# Altium PCB ADAS_ECU_MB_revA.PcbDoc (part 3 of 5)
Units mm, origin at the board's own origin, x right, y up, seen from the top; angles counter-clockwise.
Board outline 180 x 120 mm, 6 copper layers (Top Layer, Mid Layer 1, Mid Layer 2, Mid Layer 3, Mid Layer 4, Bottom Layer), stack 1.554 mm thick; 449 components, 370 nets, 3941 pads, 78 vias.
Unrouted connection lines stored in the file: 869.
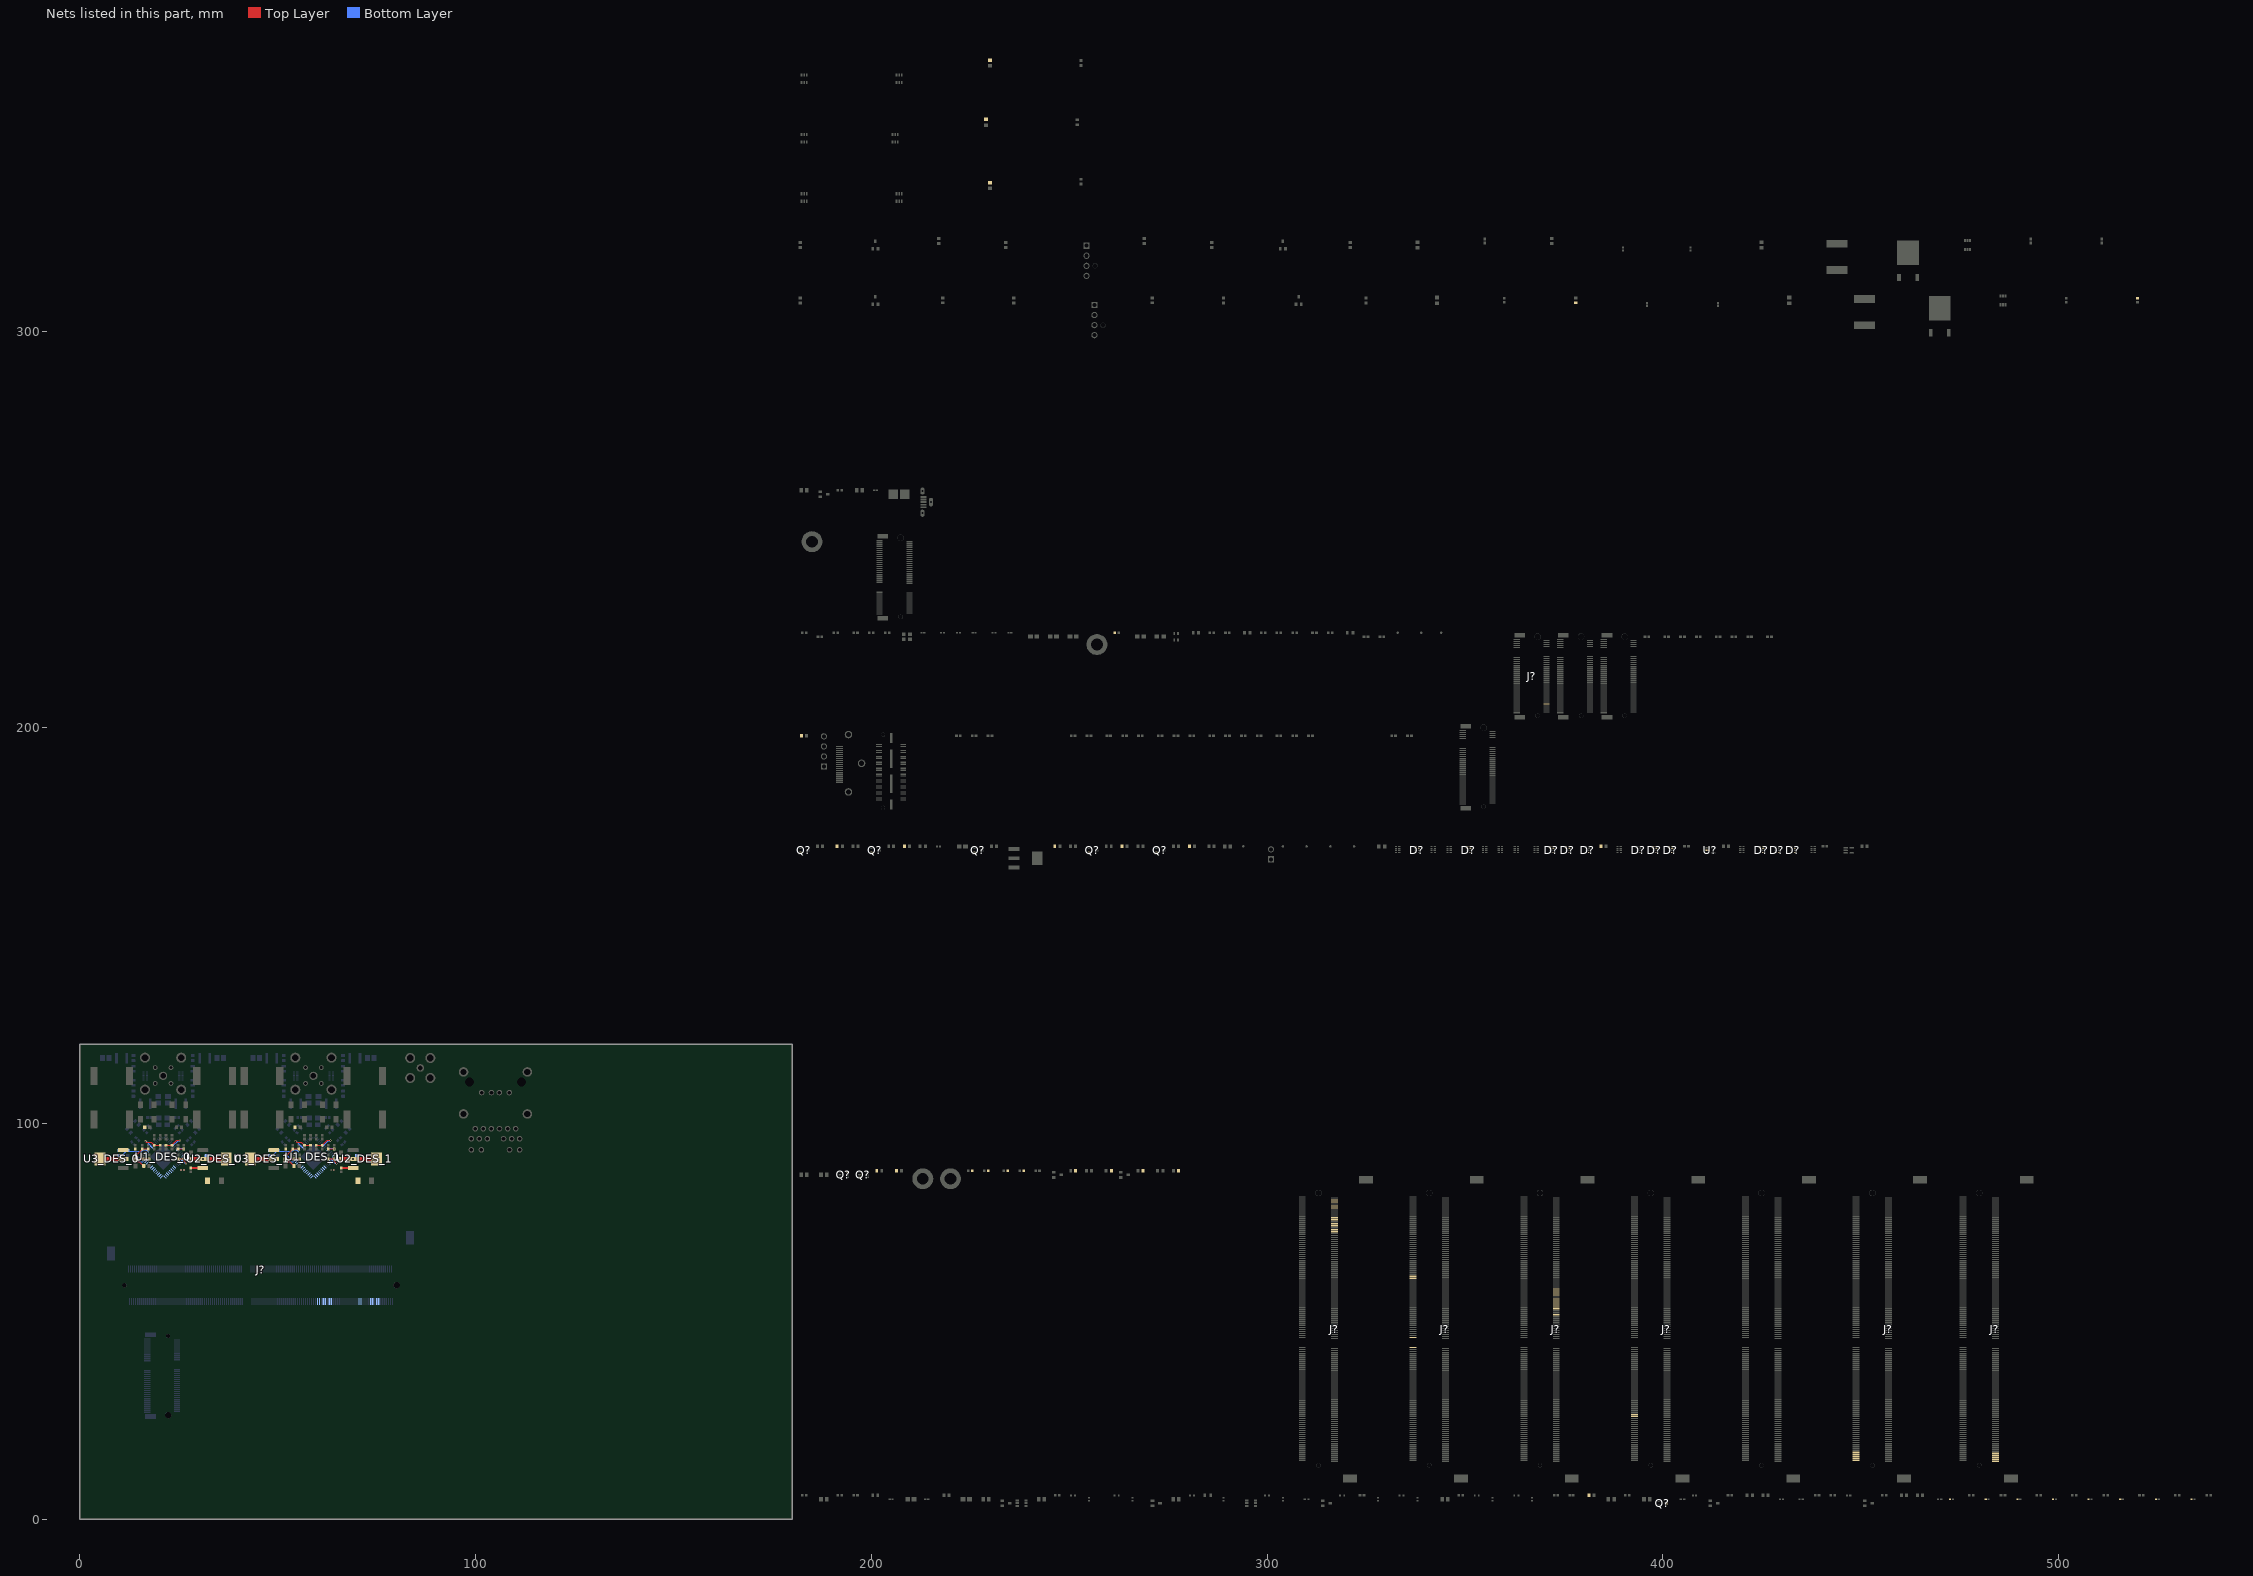
[diagram p2: the nets of this part, all layers, seen from the top]

## Part data (continued)
U? U? U?_FAN_IF_0 U?_FAN_IF_1: library part CMP-019-00043-2, "Power Supply Support Circuit, Adjustable, 1 Channel, PDSO6", Case/Package=TSSOP, Max Supply Voltage=20V, Min Supply Voltage=1.8V, Pins=6, RoHS Compliant=Yes
U?_FAN_IF_0 U?_FAN_IF_1: library part CMP-0244-00204-1, "Positive Voltage Regulator, 12V, 3-Pin DPAK, Tape and Reel", ComponentLink1Description="Manufacturer URL", ComponentLink1URL=http://www.st.com, ComponentLink2Description=Datasheet, ComponentLink2URL=http://www.st.com/internet/com/TECHNICAL_RESOURCES/TECHNICAL_LITERATURE/DATASHEET/CD00000447.pdf, DatasheetVersion=1/11/2010, PackageDescription="3-Pin Transistor Outline Package 2.28 mm Pitch, 9.7 mm Lead Span (DPAK)", PackageReference=TO-252, PackageVersion=2011
Y1_DES_0 Y1_DES_1: library part CMP-2000-05733-3, "Crystal 25MHz ±20ppm (Tol) ±30ppm (Stability) 18pF FUND 60Ω 4-Pin SMD T/R", Case/Package=CSMD, ESR (Equivalent Series Resistance)=60R, Frequency=25MHz, Frequency Stability=30ppm, Frequency Tolerance=20ppm, Load Capacitance=18pF, Max Operating Temperature=85°C, Min Operating Temperature=-40°C, Operating Frequency="25 MHz", Package Quantity=1000, Depth=2.5mm, Height=0.039inch, Lead Free="Lead Free", Length=3.2mm, Mount="Surface Mount", Number of Pins=4, Packaging="Tape and Reel", Radiation Hardening=No, Series=ABM8G, Series Resistance=60R, Termination=SMD/SMT, Tolerance=20ppm, Width=0.098inch
Y?: library part CMP-27762-001115-1, "XTAL OSC XO 32.7680KHZ CMOS SMD", Case/Package=CSMD, Frequency=32.768kHz, Frequency Stability=25ppm, Load Capacitance=15pF, Max Operating Temperature=85°C, Max Supply Current=3.5mA, Min Operating Temperature=-40°C, Min Supply Voltage=2.97V, Operating Supply Voltage=3.3V, Depth=2mm, Height=0.037inch, Lead Free="Lead Free", Length=2.5mm, Mount="Surface Mount", Number of Pins=4, Packaging="Tape and Reel", Radiation Hardening=No, Series=ASDK, Termination=SMD/SMT, Width=0.079inch

## Via types
v1: diameter 0.5, hole 0.2, Top Layer to Bottom Layer, 32 vias
v2: diameter 0.5, hole 0.3, Top Layer to Bottom Layer, 30 vias
v3: diameter 0.7, hole 0.5, Top Layer to Bottom Layer, 16 vias

## Nets (pads, with @x,y where several pads share a name; then routed paths per layer and width w, separated by ;. In a path a pad name is that pad's centre, name@x,y a point inside that pad or via, vN(x,y) a via of type N, cw(c..) or ccw(c..) an arc to the next point about the centre after c; other vN are vias at no path point)
1V8_CAM0_PWDN: J?.114@373.1,53.125 R?.1@201.375,88
1V8_CAM1_PWDN: J?.120@373.1,51.625 R?.1@206.375,88
1V8_SMB_nALERT: R?.1@384.35,170 U?.2@411.23,169
1V8_SPI1_MISO: D?.4@350.583,168.5 D?.7@351.418,168.5 J?.108@373.1,54.625 Q?.2@226.05,168.35 R?.1@246.35,170
1V8_SPI1_MOSI: D?.1@350.583,170 D?.10@351.418,170 J?.104@373.1,55.625 Q?.2@272.05,168.35 R?.1@280.35,170
1V8_SPI1_nCS_0: D?.5@350.583,168 D?.6@351.418,168 J?.110@373.1,54.125 Q?.2@200.05,168.35 R?.1@208.35,170
1V8_SPI1_nCS_1: J?.112@373.1,53.625 Q?.2@182.05,168.35 R?.1@191.35,170
1V8_SPI1_SCLK: D?.2@350.583,169.5 D?.9@351.418,169.5 J?.106@373.1,55.125 Q?.2@255.05,168.35 R?.1@263.35,170
5V_MAIN: J?.251@448.9,16.875 J?.252@484.101,16.625 J?.253@448.9,16.375 J?.254@484.101,16.125 J?.255@448.9,15.875 J?.256@484.101,15.625 J?.257@448.9,15.375 J?.258@484.101,15.125 J?.259@448.9,14.875 J?.260@484.101,14.625 R?.1@182.375,198 R?.2@260.65,88 R?.2@277.65,88 R?_RAIL_DISCH_0.2@230,337.725 R?_RAIL_DISCH_1.2@229,353.725 R?_RAIL_DISCH_2.2@230,368.725
ACT_LED: J?.10@370.65,206 R?.1@261.5,224
CAM0_PWDN: Q?.6@193.95,87.65
CAM1_PWDN: Q?.3@197.05,86.35
CAM_I2C_SCL: D?.4@380.583,168.5 D?.7@381.418,168.5 J?.213@392.9,26.375
CAM_I2C_SDA: D?.5@380.583,168 D?.6@381.418,168 J?.215@392.9,25.875
CAN_RX: D?.1@337.583,170 D?.10@338.418,170 J?.143@336.9,45.875
CAN_TX: D?.2@337.583,169.5 D?.9@338.418,169.5 J?.145@336.9,43.375
CFG0_DES_0: R6_DES_0.1 R8_DES_0.2 U1_DES_0.4 | length 8
  Bottom Layer w0.2: R6_DES_0.1@10,91.85 10.033,91.883 10.658,91.883 11.925,93.15 R8_DES_0.2@12,93.15 12.25,92.9 15.65,92.9 16.05,93.3 16.712,93.3 17.009,93.003 U1_DES_0.4@17.023,93.003
CFG0_DES_1: R6_DES_1.1 R8_DES_1.2 U1_DES_1.4 | length 8
  Bottom Layer w0.2: R6_DES_1.1@48,91.85 48.033,91.883 48.658,91.883 49.925,93.15 R8_DES_1.2@50,93.15 50.25,92.9 53.65,92.9 54.05,93.3 54.712,93.3 55.009,93.003 U1_DES_1.4@55.023,93.003
CKA_DES_0_N: U1_DES_0.40
CKA_DES_0_P: U1_DES_0.39
CKA_DES_1_N: U1_DES_1.40
CKA_DES_1_P: U1_DES_1.39
CKB_DES_0_N: U1_DES_0.46
CKB_DES_0_P: U1_DES_0.45
CKB_DES_1_N: U1_DES_1.46
CKB_DES_1_P: U1_DES_1.45
CONF_SCL_DES_0: U1_DES_0.29
  other v2: 26.25,88.25
CONF_SCL_DES_1: U1_DES_1.29
  other v2: 64.25,88.25
CONF_SDA_DES_0: U1_DES_0.28
  other v2: 25.5,88.25
CONF_SDA_DES_1: U1_DES_1.28
  other v2: 63.5,88.25
CSI0_CLK_N: D?.2@424.583,169.5 D?.9@425.418,169.5 J?.10@317.1,79.125
CSI0_CLK_P: D?.1@424.583,170 D?.10@425.418,170 J?.12@317.1,78.625
CSI0_D0_N: D?.5@424.583,168 D?.6@425.418,168 J?.4@317.1,80.625
CSI0_D0_P: D?.4@424.583,168.5 D?.7@425.418,168.5 J?.6@317.1,80.125
CSI0_D1_N: R?.2@238.5,88
CSI0_D1_P: R?.2@234.5,88
CSI1_D0_N: R?.2@229.5,88
CSI1_D0_P: R?.2@225.5,88
CSI1_D1_N: D?.4@428.583,168.5 D?.7@429.418,168.5 J?.15@75.5,55
CSI1_D1_P: D?.5@428.583,168 D?.6@429.418,168 J?.17@75,55
CSI2_CLK_N: D?.1@371.583,170 D?.10@372.418,170 J?.28@317.1,74.625
CSI2_CLK_P: D?.2@371.583,169.5 D?.9@372.418,169.5 J?.30@317.1,74.125
CSI2_D0_N: D?.4@393.583,168.5 D?.7@394.418,168.5 J?.22@317.1,76.125
CSI2_D0_P: D?.5@393.583,168 D?.6@394.418,168 J?.24@317.1,75.625
CSI2_D1_N: D?.4@371.583,168.5 D?.7@372.418,168.5 J?.34@317.1,73.125
CSI2_D1_P: D?.5@371.583,168 D?.6@372.418,168 J?.36@317.1,72.625
CSI3_D0_N: D?.1@397.583,170 D?.10@398.418,170 J?.21@74,55
CSI3_D0_P: D?.2@397.583,169.5 D?.9@398.418,169.5 J?.23@73.5,55
CSI3_D1_N: D?.4@397.583,168.5 D?.7@398.418,168.5 J?.33@71,55
CSI3_D1_P: D?.5@397.583,168 D?.6@398.418,168 J?.35@70.5,55
DA0_DES_0_N: U1_DES_0.32
DA0_DES_0_P: U1_DES_0.31
DA0_DES_1_N: U1_DES_1.32
DA0_DES_1_P: U1_DES_1.31
DA1_DES_0_N: U1_DES_0.36
DA1_DES_0_P: U1_DES_0.35
DA1_DES_1_N: U1_DES_1.36
DA1_DES_1_P: U1_DES_1.35
DA2_DES_0_N: U1_DES_0.38
DA2_DES_0_P: U1_DES_0.37
DA2_DES_1_N: U1_DES_1.38
DA2_DES_1_P: U1_DES_1.37
DA3_DES_0_N: U1_DES_0.42
DA3_DES_0_P: U1_DES_0.41
DA3_DES_1_N: U1_DES_1.42
DA3_DES_1_P: U1_DES_1.41
DB0_DES_0_N: U1_DES_0.44
DB0_DES_0_P: U1_DES_0.43
DB0_DES_1_N: U1_DES_1.44
DB0_DES_1_P: U1_DES_1.43
DB1_DES_0_N: U1_DES_0.48
DB1_DES_0_P: U1_DES_0.47
DB1_DES_1_N: U1_DES_1.48
DB1_DES_1_P: U1_DES_1.47
DB2_DES_0_N: U1_DES_0.50
DB2_DES_0_P: U1_DES_0.49
DB2_DES_1_N: U1_DES_1.50
DB2_DES_1_P: U1_DES_1.49
DB3_DES_0_N: U1_DES_0.54
DB3_DES_0_P: U1_DES_0.53
DB3_DES_1_N: U1_DES_1.54
DB3_DES_1_P: U1_DES_1.53
DEBUG_RXD: R?.2@268.625,88
DEBUG_TXD: R?.2@251.625,88
DES_1V2_DES_0: C14_DES_0.1 C19_DES_0.2 C20_DES_0.2 C21_DES_0.2 C22_DES_0.2 C29_DES_0.2 C30_DES_0.2 R11_DES_0.2 U1_DES_0.30 U1_DES_0.55 U1_DES_0.56 U3_DES_0.2 U3_DES_0.4 | length 24.7
  Top Layer w0.3: C14_DES_0.1@14,90.802 14,90.704 14.356,90.348 15.002,90.348 15.775,89.575 15.85,89.575 16.1,89.325 R11_DES_0.2@16.1,89.25 ; v2(14.25,91) 14.261,91.011 17.489,91.011 C19_DES_0.2@17.5,91.021 ; v2(14.25,92) C22_DES_0.2@15.75,93.5 ; C22_DES_0.2@15.75,93.521 C21_DES_0.2@17.25,93.521 ; C29_DES_0.2@24.75,91.021 C30_DES_0.2@26.25,91.021 26.436,90.835 26.436,90.318 26.8,89.954 v2(26.8,89.9)
  Top Layer w1: U3_DES_0.4@5.05,91 v2(10.95,91)
  Bottom Layer w0.254: U1_DES_0.30@25.685,90.705 26.442,89.947 26.753,89.947 v2(26.8,89.9)
  Bottom Layer w0.3: v2(14.25,91) 15,90.25 15.861,90.25 U1_DES_0.55@16.315,90.705 ; v2(14.25,92) 15.37,90.88 15.784,90.88 U1_DES_0.56@15.962,91.058
DES_1V2_DES_1: C14_DES_1.1 C19_DES_1.2 C20_DES_1.2 C21_DES_1.2 C22_DES_1.2 C29_DES_1.2 C30_DES_1.2 R11_DES_1.2 U1_DES_1.30 U1_DES_1.55 U1_DES_1.56 U3_DES_1.2 U3_DES_1.4 | length 24.7
  Top Layer w0.3: C14_DES_1.1@52,90.802 52,90.704 52.356,90.348 53.002,90.348 53.775,89.575 53.85,89.575 54.1,89.325 R11_DES_1.2@54.1,89.25 ; v2(52.25,91) 52.261,91.011 55.489,91.011 C19_DES_1.2@55.5,91.021 ; v2(52.25,92) C22_DES_1.2@53.75,93.5 ; C22_DES_1.2@53.75,93.521 C21_DES_1.2@55.25,93.521 ; C29_DES_1.2@62.75,91.021 C30_DES_1.2@64.25,91.021 64.436,90.835 64.436,90.318 64.8,89.954 v2(64.8,89.9)
  Top Layer w1: U3_DES_1.4@43.05,91 v2(48.95,91)
  Bottom Layer w0.254: U1_DES_1.30@63.685,90.705 64.442,89.947 64.753,89.947 v2(64.8,89.9)
  Bottom Layer w0.3: v2(52.25,91) 53,90.25 53.861,90.25 U1_DES_1.55@54.315,90.705 ; v2(52.25,92) 53.37,90.88 53.784,90.88 U1_DES_1.56@53.962,91.058
DES_1V8_DES_0: C12_DES_0.1 C23_DES_0.2 C24_DES_0.2 C25_DES_0.2 C26_DES_0.2 U1_DES_0.7 U1_DES_0.21 U2_DES_0.2 U2_DES_0.4 | length 21.7
  Top Layer w0.3: v2(16.5,95.5) 16.554,95.5 16.779,95.275 17.975,95.275 18.75,94.5 C24_DES_0.2@18.75,94.479 C23_DES_0.2@20.25,94.479 ; C25_DES_0.2@21.75,94.479 C26_DES_0.2@23.25,94.479 23.25,94.5 24.45,95.7 v2(25.3,95.7)
  Top Layer w1: C12_DES_0.1@28,91 v3(31.05,91) U2_DES_0.4@36.95,91
  Bottom Layer w0.254: v2(16.5,95.5) 16.547,95.453 16.694,95.453 U1_DES_0.7@18.083,94.063 ; U1_DES_0.21@23.563,94.417 24.799,95.653 25.253,95.653 v2(25.3,95.7)
DES_1V8_DES_1: C12_DES_1.1 C23_DES_1.2 C24_DES_1.2 C25_DES_1.2 C26_DES_1.2 U1_DES_1.7 U1_DES_1.21 U2_DES_1.2 U2_DES_1.4 | length 21.7
  Top Layer w0.3: v2(54.5,95.5) 54.554,95.5 54.779,95.275 55.975,95.275 56.75,94.5 C24_DES_1.2@56.75,94.479 C23_DES_1.2@58.25,94.479 ; C25_DES_1.2@59.75,94.479 C26_DES_1.2@61.25,94.479 61.25,94.5 62.45,95.7 v2(63.3,95.7)
  Top Layer w1: C12_DES_1.1@66,91 v3(69.05,91) U2_DES_1.4@74.95,91
  Bottom Layer w0.254: v2(54.5,95.5) 54.547,95.453 54.694,95.453 U1_DES_1.7@56.083,94.063 ; U1_DES_1.21@61.563,94.417 62.799,95.653 63.253,95.653 v2(63.3,95.7)
DES_3V3_DES_0: C11_DES_0.2 C11_DES_1.2 C13_DES_0.2 C13_DES_1.2 C27_DES_0.2 C27_DES_1.2 C28_DES_0.2 C28_DES_1.2 F5_DES_0.2 F5_DES_1.2 R2_DES_0.2 R2_DES_1.2 R5_DES_0.2 R5_DES_1.2 R6_DES_0.2 R6_DES_1.2 U1_DES_0.24 U1_DES_1.24 U2_DES_0.3 U2_DES_1.3 U3_DES_0.3 U3_DES_1.3 | length 12.9
  Top Layer w0.3: C27_DES_0.2@24.75,93.521 v2(26.25,93.521) ; C27_DES_1.2@62.75,93.521 v2(64.25,93.521)
  Top Layer w0.5: C11_DES_0.2@28,88.729 28.014,88.714 31.036,88.714 U2_DES_0.3@31.05,88.7 ; C11_DES_1.2@66,88.729 66.014,88.714 69.036,88.714 U2_DES_1.3@69.05,88.7
  Bottom Layer w0.254: U1_DES_0.24@24.624,93.356 25.018,93.75 25.955,93.75 26.183,93.521 v2(26.25,93.521) ; U1_DES_1.24@62.624,93.356 63.018,93.75 63.955,93.75 64.183,93.521 v2(64.25,93.521)
DP1_AUX_N: D?.4@375.583,168.5 D?.7@376.418,168.5 J?.98@373.1,57.125
DP1_AUX_P: D?.5@375.583,168 D?.6@376.418,168 J?.100@373.1,56.625
DP1_HPD: D?.2@375.583,169.5 D?.9@376.418,169.5 J?.96@373.1,57.625
DP1_TXD0_N: D?.1@432.583,170 D?.10@433.418,170 J?.63@63.5,55
DP1_TXD0_P: D?.2@432.583,169.5 D?.9@433.418,169.5 J?.65@63,55
DP1_TXD1_N: D?.4@432.583,168.5 D?.7@433.418,168.5 J?.69@62,55
DP1_TXD1_P: D?.5@432.583,168 D?.6@433.418,168 J?.71@61.5,55
DP1_TXD2_N: D?.1@401.583,170 D?.10@402.418,170 J?.75@60.5,55
DP1_TXD2_P: D?.2@401.583,169.5 D?.9@402.418,169.5 J?.77@60,55
DP1_TXD3_N: D?.4@401.583,168.5 D?.7@402.418,168.5 J?.81@336.9,61.375
DP1_TXD3_P: D?.5@401.583,168 D?.6@402.418,168 J?.83@336.9,60.875
DP_D0_N: C?.1@524.634,5
DP_D0_P: C?.1@533.634,5
DP_D1_N: C?.1@507.634,5
DP_D1_P: C?.1@515.634,5
DP_D2_N: C?.1@489.634,5
DP_D2_P: C?.1@498.634,5
DP_D3_N: C?.1@472.634,5
DP_D3_P: C?.1@481.634,5
DP_HDMI_CEC: D?.1@375.583,170 D?.10@376.418,170 J?.94@373.1,58.125
DP_HPD: Q?.3@400.95,4 R?.1@381.35,6
ENABLE_FAN_IF_0: R?_FAN_IF_0.1@378,307.375 R?_FAN_IF_0.2@520.001,308.5